# Altium PCB amp_v2.PcbDoc
Units mm, origin at the board's own origin, x right, y up, seen from the top; angles counter-clockwise.
Board outline 25 x 21 mm, 2 copper layers (Top Layer, Bottom Layer), stack 0.581 mm thick; 10 components, 7 nets, 73 pads, 59 vias.
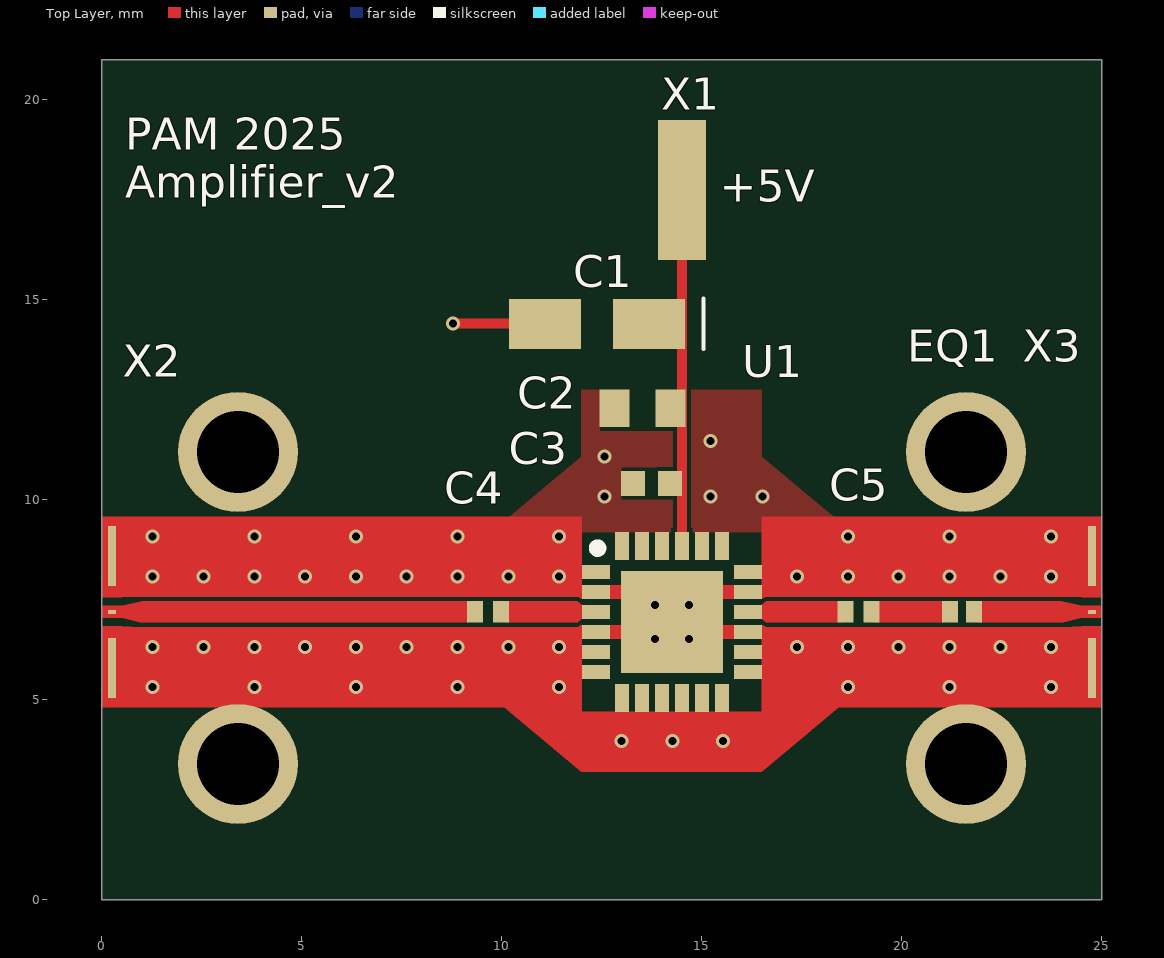
[diagram p0: Top Layer view]
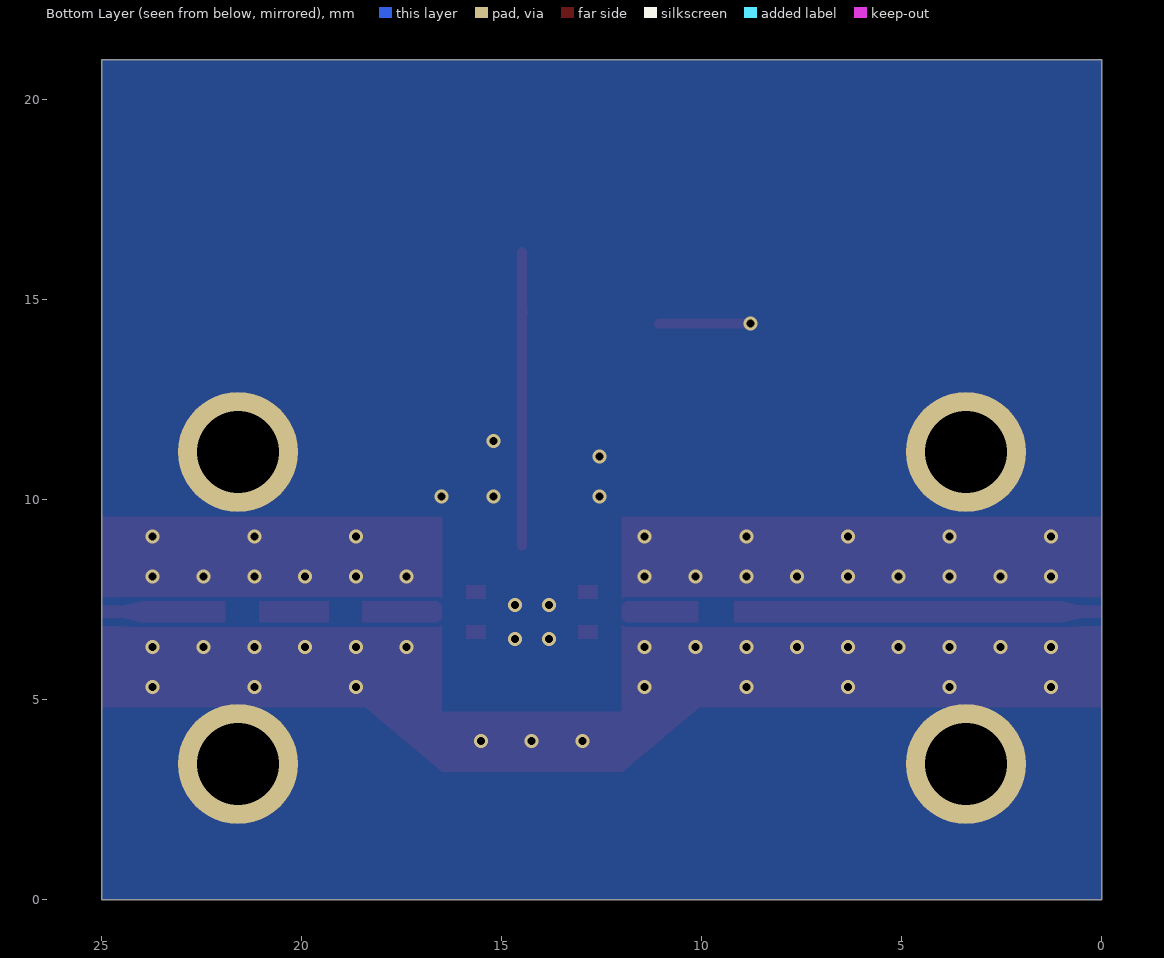
[diagram p1: Bottom Layer view, seen from below]
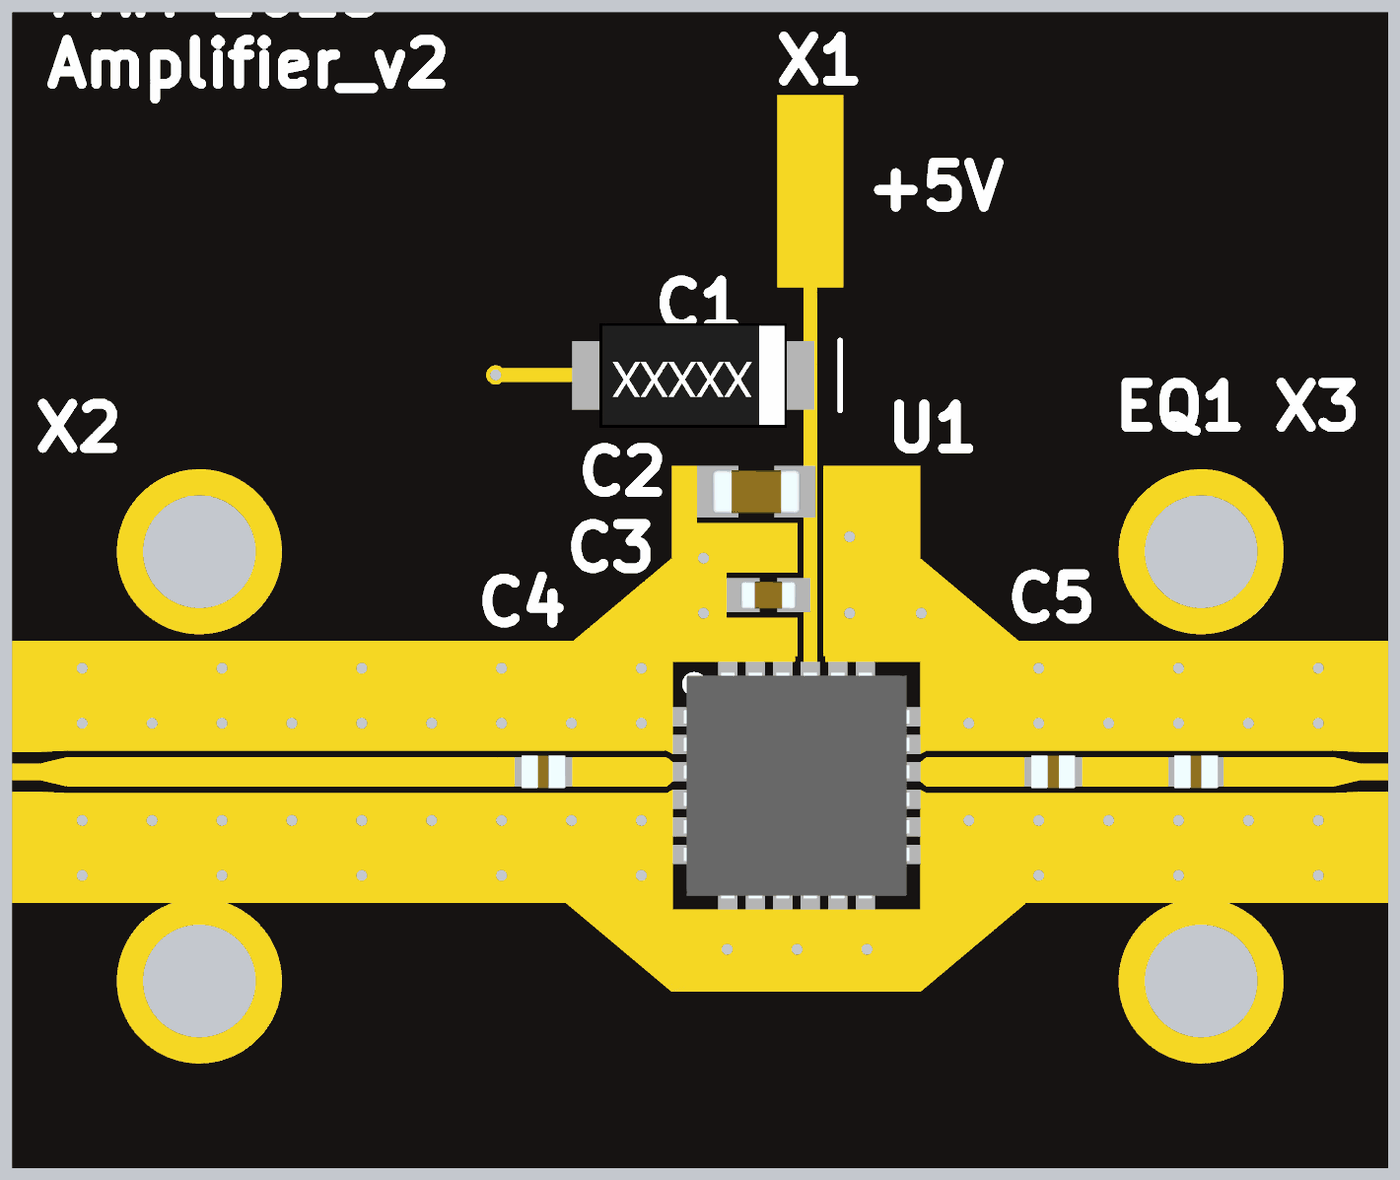
[diagram p2: 3D render of the assembled board from above, using the file's embedded part models]

## Layer stack, top to bottom
Top Layer: signal copper 0.0356
Dielectric 1: dielectric 0.51, Rogers 4350B, Dk 3.48
Bottom Layer: signal copper 0.0356

## Board outline
0,0 25,0 25,21 0,21

## Design rules (kind name [scope] priority, off if disabled: settings)
Clearance [All] p1: gap=0.1 ignorepadtopadclearanceinfootprint=FALSE
HoleSize [All] p1: absolutevalues=TRUE maxlimit=5 minlimit=0.01 maxpercent=80.000 minpercent=20.000
MinimumSolderMaskSliver [All] p1: minsoldermaskwidth=0.15
PolygonConnect [All] p1: connectstyle=Direct reliefconductorwidth=0.254 reliefentries=4 polygonreliefangle="90 Angle" airgapwidth=0.254
RoutingVias [All] p1: holewidth=0.711 width=1.27 viastyle="Through Hole" minholewidth=0.1 minwidth=0.01 maxholewidth=5 maxwidth=5
SilkToSilkClearance [All] p1: silktosilkclearance=0.15
SilkToSolderMaskClearance [IsPad] p1: minsilkscreentomaskgap=0.15 clearancetoexposedcopper=TRUE
SolderMaskExpansion [All] p1: expansion=0.102 istentingtop=FALSE
SupplyNets "Schematic Supply Nets" [InNet('GND')] p1: voltage=0.000
Width [All] p1: maxlimit=0.254 minlimit=0.254 preferedwidth=0.254
26 further rules are at their usual default settings.

## Components (designator, comment, footprint, x,y, rotation, side; value= is the part's Value field where it differs from the comment)
C1 "4.7 uF" C4_7UF 12.374,14.404 r180 top value=4.7uF
C2 "1000 pF" C1000PF__C100NF 13.519,12.29 r180 top value=1nF
C3 "100 pF" C100PF 13.739,10.41 r180 top
C4 "10nF" C10NF 9.65,7.2 r0 top
C5 "10nF" C10NF 18.912,7.2 r0 top
EQ1 "AEQ05472-10" EQ_AEQ05472 21.508,7.2 r0 top
U1 "MML098GQ4A" AMP_MML098GQ4A 14.25,6.95 r0 top
X1 "Solder Pad" "Solder Pad" 14.5,17.75 r0 top
X2 "Solder Pad" "CPW EDGE CONNECTOR" 0.25,7.2 r90 top
X3 "Solder Pad" "CPW EDGE CONNECTOR" 24.75,7.2 r270 top

## Footprints (in the part's own frame and the unit in brackets; to place one, negate y for a bottom-side part, rotate by r counter-clockwise, add the part's x,y. Pads: shape width x height; smd on the part's side, far side on the other; paste and mask are expansions set on the pad)
AMP_MML098GQ4A [mm]
  rect 0.7x0.35 smd: 1(-1.9,1.25) 2(-1.9,0.75) 3(-1.9,0.25) 4(-1.9,-0.25) 5(-1.9,-0.75) 6(-1.9,-1.25) 13(1.9,-1.25) 14(1.9,-0.75) 15(1.9,-0.25) 16(1.9,0.25) 17(1.9,0.75) 18(1.9,1.25)
  rect 0.7x0.35 on Top Paste: 1(-1.9,1.25) 2(-1.9,0.75) 3(-1.9,0.25) 4(-1.9,-0.25) 5(-1.9,-0.75) 6(-1.9,-1.25) 13(1.9,-1.25) 14(1.9,-0.75) 15(1.9,-0.25) 16(1.9,0.25) 17(1.9,0.75) 18(1.9,1.25)
  rect 0.35x0.7 smd: 7(-1.25,-1.9) 8(-0.75,-1.9) 9(-0.25,-1.9) 10(0.25,-1.9) 11(0.75,-1.9) 12(1.25,-1.9) 19(1.25,1.9) 20(0.75,1.9) 21(0.25,1.9) 22(-0.25,1.9) 23(-0.75,1.9) 24(-1.25,1.9)
  rect 0.35x0.7 on Top Paste: 7(-1.25,-1.9) 8(-0.75,-1.9) 9(-0.25,-1.9) 10(0.25,-1.9) 11(0.75,-1.9) 12(1.25,-1.9) 19(1.25,1.9) 20(0.75,1.9) 21(0.25,1.9) 22(-0.25,1.9) 23(-0.75,1.9) 24(-1.25,1.9)
  rect 2.55x2.55 smd: 25(0,0)
  rect 2.5x2.5 on Top Paste: 25(0,0)
  Top Layer region: 1.15,-0.425 1.65,-0.425 1.65,-0.075 1.15,-0.075
  Top Layer region: 1.15,0.575 1.65,0.575 1.65,0.925 1.15,0.925
  Top Layer region: -1.65,-0.425 -1.15,-0.425 -1.15,-0.075 -1.65,-0.075
  Top Layer region: -1.65,0.575 -1.15,0.575 -1.15,0.925 -1.65,0.925
  silkscreen extent -1.96,1.74 -1.76,1.94, body extent -2.05,-2.05 2.05,2.05, height 1.05
C4_7UF [mm]
  rect 1.8x1.25 smd: 1(-1.3,0) 2(1.3,0)
  silkscreen extent -2.67,-0.64 -2.67,0.63, body extent -1.7,-0.95 1.7,0.95, height 1.84
C10NF [mm]
  rect 0.4x0.538 smd: 1(-0.325,0) 2(0.325,0)
  body extent -0.4,-0.3 0.4,0.3, height 0.14
C100PF [mm]
  rect 0.6x0.62 smd: 1(-0.46,0) 2(0.46,0)
  body extent -0.5,-0.25 0.5,0.25, height 0.55
C1000PF__C100NF [mm]
  rect 0.75x0.94 smd: 1(-0.7,0) 2(0.7,0)
  body extent -0.8,-0.4 0.8,0.4, height 0.9
"CPW EDGE CONNECTOR" [mm]
  rect 0.1x0.2 smd paste-2539.97 mask-10: 1(0,0)
  rect 1.5x0.2 smd paste-2539.97 mask-10: 2(-1.4,0) 3(1.4,0)
  Top Layer region: -2.383,0.25 -0.361,0.25 -0.361,-0.25 -0.383,-0.75 -2.383,-0.75
  Top Layer region: -0.15,0.25 0.15,0.25 0.15,-0.25 0.269,-0.75 -0.269,-0.75 -0.15,-0.25
  Top Layer region: 2.383,0.25 0.361,0.25 0.361,-0.25 0.383,-0.75 2.383,-0.75
EQ_AEQ05472 [mm]
  rect 0.4x0.538 smd: 1(-0.3,0) 2(0.3,0)
  body extent -0.4,-0.3 0.4,0.3, height 0.14
"Solder Pad" [mm]
  rect 1.2x3.5 smd paste-2539.97: 1(0,0)

## Part data
C1: library part C7_4uF_TH3A475K010C2900, "Tantalum Capacitor, Polarized, Tantalum (dry/solid), 10V, 10% +Tol, 10% -Tol, 4.7uF, Surface Mount, 1306", Capacitor Type=Tantalum, Case/Package=1206, ESR (Equivalent Series Resistance)=2.9R, Leakage Current=500nA, Manufacturer="Vishay Sprague", Manufacturer Part Number=TH3A475K010C2900, Max Operating Temperature=150°C, Min Operating Temperature=-55°C, Package Shape=Rectangular, Package Style=SMTMeter, Rated DC Voltage (URdc)=10V, Ripple Current=160mA, Supplier Part Number=4924098, Tolerance  (fill in as +-)=10%, Category="Tantalum Capacitors", ComponentLink1Description=https://datasheet.ciiva.com:443/pdfs/VipMasterIC/IC/VISH/VISH-S-A0010085390/VISH-S-A0010085390-1.pdf?src-supplier=IHS+Markit, ComponentLink1URL=https://datasheet.ciiva.com:443/pdfs/VipMasterIC/IC/VISH/VISH-S-A0010085390/VISH-S-A0010085390-1.pdf?src-supplier=IHS+Markit, ComponentLink2Description=https://datasheet.ciiva.com/268/th3-268785.pdf?src-supplier=Digikey, ComponentLink2URL=https://datasheet.ciiva.com/268/th3-268785.pdf?src-supplier=Digikey, ComponentLink3Description=https://datasheet.ciiva.com/16360/th3-16360891.pdf?src-supplier=Future+Electronics, ComponentLink3URL=https://datasheet.ciiva.com/16360/th3-16360891.pdf?src-supplier=Future+Electronics, Dielectric Material=Tantalum, Height=1.6mm, JESD-609 Code=e3, Length=3.2mm, Mounting Technology="Surface Mount", Packaging="Tape and Reel", Pins=2, Polarity=Polarized, Pricing="2000=0.178, 4000=0.175, 6000=0.173, 8000=0.171, 10000=0.166 (USD)", Reach SVHC Compliant=Yes, Reference Standard=AEC-Q200, RoHS=Yes, RoHS Compliant=Yes, Stock=2000, Supplier="Future Electronics", Tan Delta=0.06, Terminal Finish=Tin, Termination="J BEND", Tolerance (fill in as +-)=10%, Width=1.6mm
C2: library part C1000pF_GCM1885C1H102FA16D, "Ceramic Capacitor, Multilayer, Ceramic, 50V, 1% +Tol, 1% -Tol, C0G, 30ppm/Cel TC, 0.001uF, Surface Mount, 0603", Capacitor Type=Ceramic, Case/Package=0603, Manufacturer=Murata, Manufacturer Part Number=GCM1885C1H102FA16D, Max Operating Temperature=125°C, Min Operating Temperature=-55°C, Package Shape=Rectangular, Rated DC Voltage (URdc)=50V, Supplier Part Number=81-GCM1885C1H102FA6D, Temperature Characteristics Code=C0G, Tolerance  (fill in as +-)=1%, Category="Ceramic Capacitors", ComponentLink1Description=https://datasheet.ciiva.com:443/pdfs/VipMasterIC/IC/MURE/MURE-S-A0004370842/MURE-S-A0004372260-1.pdf?src-supplier=IHS+Markit, ComponentLink1URL=https://datasheet.ciiva.com:443/pdfs/VipMasterIC/IC/MURE/MURE-S-A0004370842/MURE-S-A0004372260-1.pdf?src-supplier=IHS+Markit, Dielectric Material=Ceramic, Mounting Technology="Surface Mount", Multilayer=Yes, Packaging="Tape and Reel", Pins=2, Pricing="1=0.35, 10=0.229, 50=0.229, 100=0.138, 1000=0.092, 10000=0.074 (USD)", Reach SVHC Compliant=Yes, Reference Standard=AEC-Q200, RoHS=Yes, RoHS Compliant=Yes, Stock=27229, Supplier=Mouser, Termination=Wraparound, Tolerance (fill in as +-)=1%
C3: library part C100pF_GRM1555C2A101FA01D, "Multilayer Ceramic Capacitors MLCC - SMD/SMT 100 pF 100 VDC 1% 0402 C0G (NP0)", Manufacturer=Murata, Manufacturer Part Number=GRM1555C2A101FA01D, Supplier Part Number=81-GRM1555C2A11FA1D, Pricing="1=0.18, 10=0.119, 50=0.119, 100=0.06, 1000=0.039, 10000=0.035 (USD)", RoHS=No, Stock=21646, Supplier=Mouser
C4 C5: library part C10nF_939113733510, Manufacturer=Murata, Manufacturer Part Number=939113733510, Supplier Part Number=961-939113733510, Pricing="1000=3.63, 10000=3.49 (USD)", RoHS=No, Stock=402, Supplier=Mouser
EQ1: library part EQ_AEQ05472-10, "Rf Filter Gain Equalizer 2SMD", Manufacturer="Knowles Dielectric Labs", Supplier Part Number=1761-1006-ND, ComponentLink1Description=http://www.mouser.com/ds/2/110/Dielectriclaboratories_EW_Series-340573.pdf?src-supplier=Mouser, ComponentLink1URL=http://www.mouser.com/ds/2/110/Dielectriclaboratories_EW_Series-340573.pdf?src-supplier=Mouser, ComponentLink2Description=http://www.knowlescapacitors.com/getattachment/69df7735-7ed2-4c4f-903b-a99acda4fa2d/Gain-Equalizers.aspx?src-supplier=Digikey, ComponentLink2URL=http://www.knowlescapacitors.com/getattachment/69df7735-7ed2-4c4f-903b-a99acda4fa2d/Gain-Equalizers.aspx?src-supplier=Digikey, Manufacturer Part Number=AEQ05472-10, Pricing="10=7.145, 20=6.5195, 30=6.203, 50=5.8498, 70=5.64214, 100=5.4415, 250=5.00556, 500=4.7401, 1000=4.51981 (USD)", RoHS=Yes, Stock=390, Supplier=Digikey
U1: library part amp_MML098GQ4A, "Low Noise Amplifier / Low current consumption / Low noise figure / Pb-free RoHS compliant QFN package / Ultra wideband performance / Positive bias / Ready for Space Qualification", Current (mA)=57, Frequency (GHz)=0.05-20.00, Voltage (VDC)=5.0, Gain (dB)=23.00, Manufacturer Part Number=MML098GQ4A, Noise Figure (dB)=2.3, Output P1dB (dBm)=12.00
X1: "Pad to solder wires to"
X2 X3: library part "RF  CPW Solder Pad", "Solder pad for RF Coplanar Waveguide Rogers 4350B Thickness 0.020\" Copper 1oz"

## Free pads (board coordinates)
  round 3 hole 2.05 mask-2539.97: 1(3.4,3.4) 1(3.4,11.2) 1(21.6,3.4) 1(21.6,11.2)

## Via types
v1: diameter 0.35, hole 0.2, Top Layer to Bottom Layer, 59 vias

## Nets (pads, with @x,y where several pads share a name; then routed paths per layer and width w, separated by ;. In a path a pad name is that pad's centre, name@x,y a point inside that pad or via, vN(x,y) a via of type N, cw(c..) or ccw(c..) an arc to the next point about the centre after c; other vN are vias at no path point)
+5V: C1.1 C2.1 C3.1 U1.21@14.5,8.85 X1.1 | length 7.4
  Top Layer w0.254: C1.1@14.481,14.681 C1.1@14.5,14.7 ; U1.21@14.5,8.85 C1.1@14.5,14.7 ; X1.1@14.5,16.198 C1.1@14.5,14.7
C4: C4.2 U1.3@12.35,7.2
C5: C5.2 EQ1.1
GND: C1.2 C2.2 C3.2 pad.1 U1.1@12.35,8.2 U1.2@12.35,7.7 U1.4@12.35,6.7 U1.5@12.35,6.2 U1.6@12.35,5.7 U1.7@13,5.05 U1.8@13.5,5.05 U1.9@14,5.05 U1.10@14.5,5.05 U1.11@15,5.05 U1.12@15.5,5.05 U1.13@16.15,5.7 U1.14@16.15,6.2 U1.15@16.15,6.7 U1.17@16.15,7.7 U1.18@16.15,8.2 U1.19@15.5,8.85 U1.20@15,8.85 U1.22@14,8.85 U1.23@13.5,8.85 U1.24@13,8.85 U1.25@14.25,6.95 X2.2 X2.3 X3.2 X3.3 | length 2.3
  Top Layer w0.254: v1(8.783,14.412) 11.066,14.412 C1.2
  other v1: 12.989,3.975 14.259,3.975 15.529,3.975 1.27,5.317 3.81,5.317 6.35,5.317 8.89,5.317 11.43,5.317 18.65,5.317 21.19,5.317 23.73,5.317 1.27,6.317 2.54,6.317 3.81,6.317 5.08,6.317 6.35,6.317 7.62,6.317 8.89,6.317 10.16,6.317 11.43,6.317 17.38,6.317 18.65,6.317 19.92,6.317 21.19,6.317 22.46,6.317 23.73,6.317 13.825,6.525 14.675,6.525 13.825,7.375 14.675,7.375 1.27,8.083 2.54,8.083 3.81,8.083 5.08,8.083 6.35,8.083 7.62,8.083 8.89,8.083 10.16,8.083 11.43,8.083 17.38,8.083 18.65,8.083 19.92,8.083 21.19,8.083 22.46,8.083 23.73,8.083 1.27,9.083 3.81,9.083 6.35,9.083 8.89,9.083 11.43,9.083 18.65,9.083 21.19,9.083 23.73,9.083 12.559,10.083 15.215,10.083 16.515,10.083 12.559,11.083 15.215,11.472
RFin: C4.1 X2.1
RFout: EQ1.2 X3.1
U1: C5.1 U1.16@16.15,7.2
pads on no net: U1.1@12.35,8.2 U1.2@12.35,7.7 U1.3@12.35,7.2 U1.4@12.35,6.7 U1.5@12.35,6.2 U1.6@12.35,5.7 U1.7@13,5.05 U1.8@13.5,5.05 U1.9@14,5.05 U1.10@14.5,5.05 U1.11@15,5.05 U1.12@15.5,5.05 U1.13@16.15,5.7 U1.14@16.15,6.2 U1.15@16.15,6.7 U1.16@16.15,7.2 U1.17@16.15,7.7 U1.18@16.15,8.2 U1.19@15.5,8.85 U1.20@15,8.85 U1.21@14.5,8.85 U1.22@14,8.85 U1.23@13.5,8.85 U1.24@13,8.85 U1.25@14.25,6.95

## Polygon pours and split planes (outlines as drawn)
GND on Bottom Layer "GND_L02_P003" (solid, pour order 3): 0,0 25,0 25,21 0,21
GND on Top Layer "GND_L01_P000" (solid, pour order 0): 11.983,12.76 16.499,12.76 16.499,11.083 18.742,9.197 9.735,9.197 11.983,11.083

## Other copper
Top Layer:
  rectangle net C4: 10.086,6.931 11.89,7.469
  rectangle net U1: 16.611,6.931 18.493,7.469
  rectangle net C5: 19.329,6.931 21.072,7.469
  rectangle net RFout: 21.906,6.931 24,7.469
  rectangle net RFin: 1,6.931 9.195,7.469
  region net GND: 12,7.525 11.882,7.586 12,7.586
  region net GND: 12,6.875 11.882,6.814 12,6.814
  region net GND: 16.5,6.875 16.618,6.814 16.5,6.814
  region net GND: 16.5,7.525 16.618,7.586 16.5,7.586
  region net GND: 10.057,4.817 12.001,4.817 12.001,4.701 16.499,4.701 16.499,4.817 18.423,4.817 16.499,3.201 11.983,3.201
  region net GND: 0.955,9.583 12.001,9.583 12.001,7.583 0.955,7.583
  pour cut-out: 13.859,10 12.98,10 12.98,10.82 13.859,10.82
  pour cut-out: 12.445,12.86 13.799,12.86 13.799,11.72 12.445,11.72
  region net U1: 16.611,7.469 16.5,7.375 16.5,7.025 16.611,6.931
  region net C4: 11.889,7.469 12,7.375 12,7.025 11.889,6.931
  region net GND: 16.499,4.817 24.02,4.817 24.02,6.817 16.499,6.817
  region net GND: 16.498,9.583 24.042,9.583 24.042,7.583 16.498,7.583
  region net GND: 0.964,6.817 12.001,6.817 12.001,4.817 0.964,4.817

## Silkscreen, mask and mechanical layers (free items; w line width, h text height)
Top Overlay:
  text "PAM 2025 / Amplifier_v2" at 0.584,17.558 h0.8
  text "+5V" at 15.44,17.459 h0.8
Top Solder:
  circle w1.5: c21.6,11.2 r0.75
  circle w1.5: c21.6,3.4 r0.75
  circle w1.5: c3.4,11.2 r0.75
  circle w1.5: c3.4,3.4 r0.75
  region: 0,0 25,0 25,21 0,21
Bottom Solder:
  circle w1.5: c21.6,11.2 r0.75
  circle w1.5: c21.6,3.4 r0.75
  circle w1.5: c3.4,11.2 r0.75
  circle w1.5: c3.4,3.4 r0.75
  region: 0,0 25,0 25,21 0,21
Board:
  the board outline again, w0.1